# EAGLE board RTC (EAGLE 9.6.2)
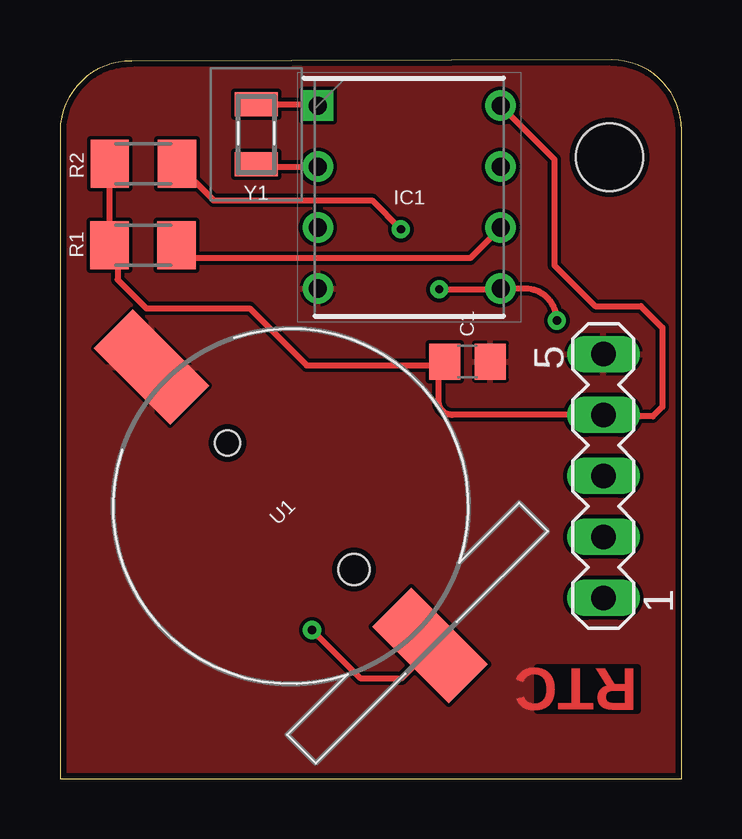
[diagram p0: board, top side]
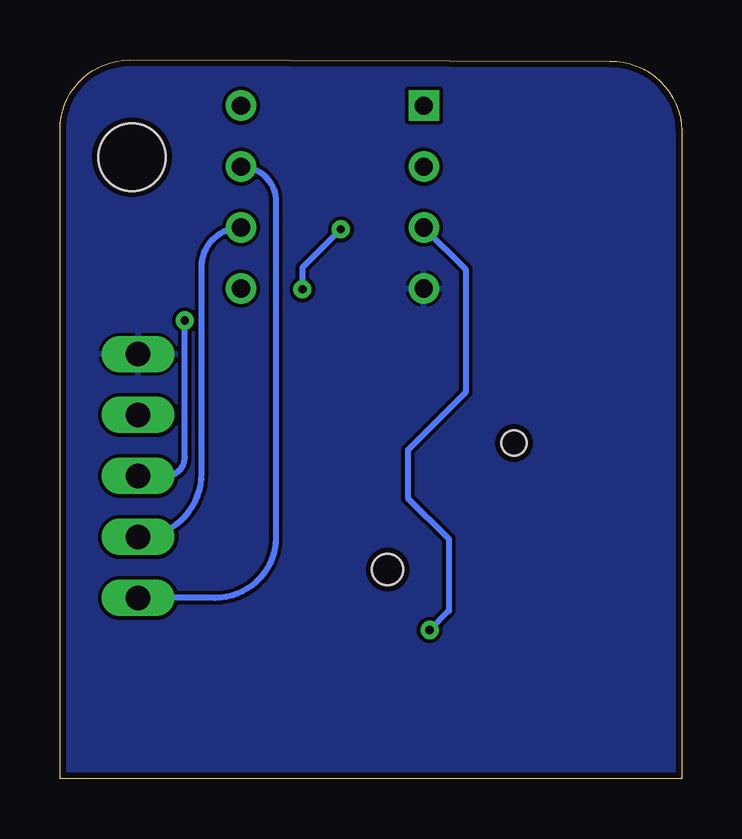
[diagram p1: board, bottom side, seen from below]

Size 25.9 x 29.95 mm. Coordinates in mm from the lower left corner, seen from the top.
Outline: 25.9,0 25.9,27.05 arc90 22.99,29.95 2.99,29.91 arc90 0,27.01 0,0 25.9,0
Copper layers (1*16): Top 0.035mm / dielectric 1.5mm / Bottom 0.035mm
Design rules "default *": minimum track width 6mil, minimum drill 0.35mm, track to track 6mil, track to pad 6mil, pad to pad 6mil, via to via 6mil, smd to smd 6mil, copper to edge 10mil, drill to drill 6mil, minimum pad ring 10mil, minimum via ring 8mil, stop-mask expansion 4mil, vias tented up to drill 0mil, thermal gap 5mil
Holes 2.8 mm at 22.9,25.9

## Footprints (pad centres in the part's own frame; a part is rotated, then mirrored left to right if it is on the bottom)
C0805 = smd 1.3 x 1.5: 1 -0.95,0; 2 0.95,0
DIP762W56P254L938H457Q8N = drill 0.76 pad 1.16 square: 1 -3.81,3.81 | drill 0.76 pad 1.16: 2 -3.81,1.27; 3 -3.81,-1.27; 4 -3.81,-3.81; 5 3.81,-3.81; 6 3.81,-1.27; 7 3.81,1.27; 8 3.81,3.81
M1206 = smd 1.6 x 2: 1 -1.4,0; 2 1.4,0
MA05-1 = drill 1.016 long: 1 -5.08,0; 2 -2.54,0; 3 0,0; 4 2.54,0; 5 5.08,0
S8411-45R_1 = smd 2.3 x 4.5: 1 0,-8.2; 2 0,8.2 | hole 1.3: 0,-3.725 | hole 1.05: 0,3.725
CM7VT1A32768KHZ125PF10PPMTBQC = smd 1 x 1.8: 1 -1.25,0; 2 1.25,0

## Placement (x,y rotation side)
C1  0.1uF  [C0805]  16.98,17.39 180 top
IC1  DS1307N+  [DIP762W56P254L938H457Q8N]  14.55,24.24 0 top
R1  2.2K  [M1206]  3.46,22.23 0 top
R2  2.2K  [M1206]  3.47,25.63 0 top
SV1  [MA05-1]  22.64,12.62 90 top
U1  S8411-45R  [S8411-45R_1]  9.61,11.36 45 top
Y1  CM7V-T1A-32.768K-9PF-20PPM-TA-  [CM7VT1A32768KHZ125PF10PPMTBQC]  8.17,26.85 90 top

## Library data of the parts
C1 = rcl; SPICEPREFIX: C
IC1 = MouserUseful; DESCRIPTION: 64 x 8, Serial, I2C Real-Time Clock; HEIGHT: 4.572mm; MANUFACTURER_NAME: Maxim Integrated; MANUFACTURER_PART_NUMBER: DS1307N+; MOUSER_PART_NUMBER: 700-DS1307N; MOUSER_PRICE-STOCK: https://www.mouser.co.uk/ProductDetail/Maxim-Integrated/DS1307N%2b?qs=0Y9aZN%252BMVCUaDyAv0LKbtw%3D%3D
R1 R2 = rcl; SPICEPREFIX: R
SV1 = con-lstb; OC_FARNELL: unknown; OC_NEWARK: unknown
U1 = MouserUseful; DESCRIPTION: HARWIN - S8411-45R - HOLDER, COIN CELL, CR1220, FULL REEL; HEIGHT: mm; MANUFACTURER_NAME: HARWIN; MANUFACTURER_PART_NUMBER: S8411-45R; MOUSER_PART_NUMBER: 855-S8411-45R; MOUSER_PRICE-STOCK: https://www.mouser.co.uk/ProductDetail/Harwin/S8411-45R?qs=Qom7kyPojXY6B0JhnWxDgQ%3D%3D
Y1 = MouserUseful; DESCRIPTION: Crystals 32.768 kHz 9.0 pF +/-20 PPM AEC-Q200; HEIGHT: 0.65mm; MANUFACTURER_NAME: MICRO CRYSTAL; MANUFACTURER_PART_NUMBER: CM7V-T1A-32.768k-9pF-20PPM-TA-QA T3; MOUSER_PART_NUMBER: 428-201568-MG03; MOUSER_PRICE-STOCK: https://www.mouser.com/Search/Refine.aspx?Keyword=428-201568-MG03

## Nets
GND: C1.1 IC1.4 SV1.5 U1.2
N$1: IC1.1 Y1.2
N$2: IC1.2 Y1.1
SCL: IC1.6 R1.2 SV1.2
SDA: IC1.5 R2.2 SV1.3
SQW/OUT: IC1.7 SV1.1
VBAT: IC1.3 U1.1
VCC: C1.2 IC1.8 R1.1 R2.1 SV1.4

## Tracks (layer width: path | path; a pad name or v marks a point on that pad's centre or on a via)
GND
  pour Top: 0,-0.3 0,27.08 arc-90 3,30.08 23.07,30.08 arc-90 26.07,27.08 26.07,-0.3
  pour Bottom: 0,-0.2 0,27.08 arc-90 3,30.08 23.07,30.08 arc-90 26.27,26.88 26.27,-0.2
N$1
  Top 0.254: Y1.2 10.69,28.1 IC1.1
N$2
  Top 0.254: Y1.1 8.26,25.51 IC1.2
SCL
  Top 0.254: R1.2 5.39,21.7 17.09,21.7 IC1.6
  Bottom 0.254: SV1.2 arc-90 19.99,12.73 19.99,21.34 arc90 IC1.6
SDA  (via drill 0.35)
  Top 0.254: v20.7,19.1 arc90 19.37,20.43 IC1.5 18.33,20.4 v15.8,20.4 | R2.2 6.4,24.1 13,24.1 v14.2,22.9
  Bottom 0.254: SV1.3 21.48,12.62 arc-90 20.7,13.4 v20.7,19.1 | v14.2,22.9 15.8,21.3 v15.8,20.4
SQW/OUT
  Bottom 0.254: IC1.7 arc90 16.9,24.05 16.9,10.08 arc90 19.44,7.54 SV1.1
VBAT  (via drill 0.35)
  Top 0.254: 15.25,5 15.25,5.2 | 15.25,5.2 15.25,5.4 U1.1 | v10.5,6.2 12.5,4.2 14.25,4.2 15.25,5.2
  Bottom 0.254: IC1.3 9,21.23 9,16.1 11.4,13.7 11.4,11.7 9.7,10 9.7,7 v10.5,6.2
VCC
  Top 0.254: R2.1 R1.1 2.4,21.89 2.4,20.8 3.6,19.6 7.9,19.6 10.27,17.23 15.87,17.23 | 15.87,17.23 15.77,17.13 15.77,15.75 arc90 16.36,15.16 SV1.4 22.7,15.1 24.7,15.1 25.1,15.5 25.1,18.8 24.2,19.7 22.3,19.7 20.6,21.4 20.6,25.81 IC1.8 | 15.87,17.23 C1.2

## Text on the board
Top: RTC
tStop: RTC